# Altium PCB sEMG_sensor_V1.PcbDoc
Units mil, origin at the board's own origin, x right, y up, seen from the top; angles counter-clockwise.
Board outline 6000 x 4000 mil, 2 copper layers (Top Layer, Bottom Layer); 29 components, 27 nets, 82 pads, 0 vias.
Unrouted connection lines stored in the file: 55.
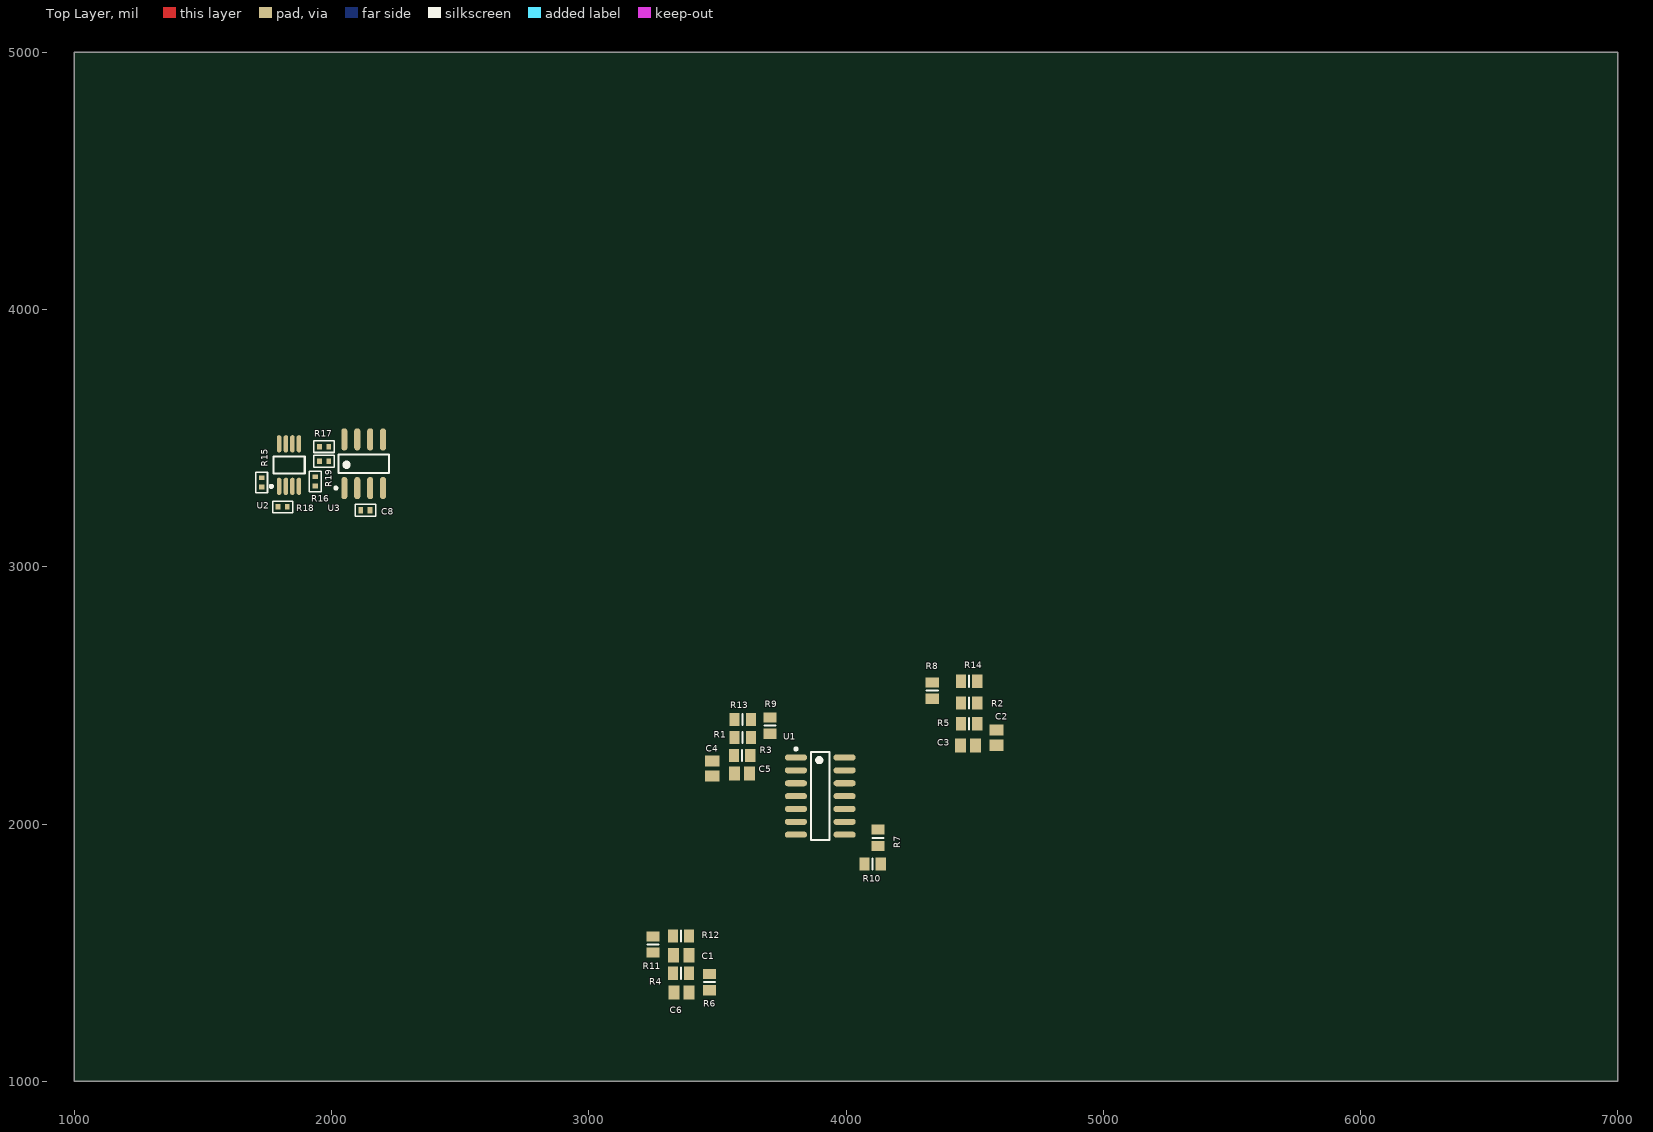
[diagram p0: Top Layer view]
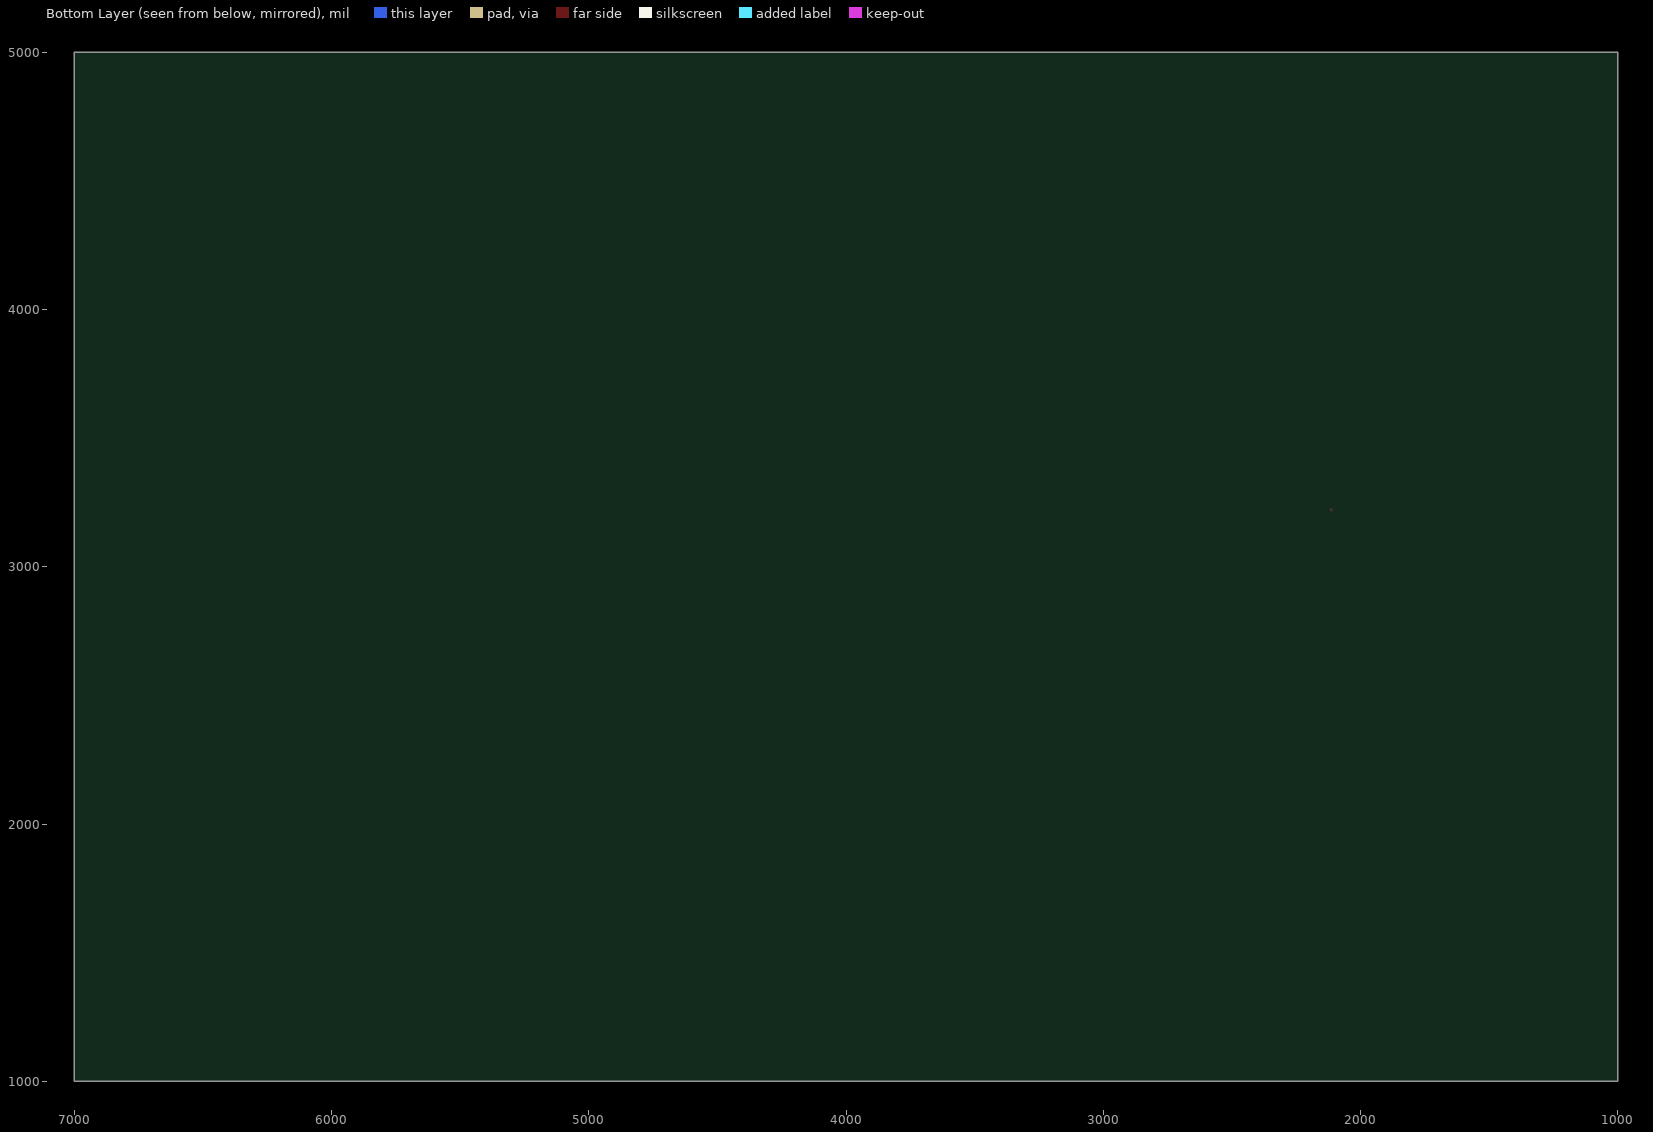
[diagram p1: Bottom Layer view, seen from below]

## Layer stack, top to bottom
Top Solder: solder mask 0.4, Solder Resist, Dk 3.5
Top Layer: signal copper 1.4
Dielectric 1: dielectric 12.6, FR-4, Dk 4.8
Bottom Layer: signal copper 1.4
Bottom Solder: solder mask 0.4, Solder Resist, Dk 3.5

## Board outline
1000,1000 7000,1000 7000,5000 1000,5000

## Design rules (kind name [scope] priority, off if disabled: settings)
Clearance [All] p1: gap=10 ignorepadtopadclearanceinfootprint=FALSE except(0: Arc-Hole Track-Hole SMDPad-Hole THPad-Hole Via-Hole Fill-Hole Poly-Hole Region-Hole Text-Hole; 1: SMDPad-SMDPad)
PolygonConnect [All] p1: connectstyle=Relief reliefconductorwidth=10 reliefentries=4 polygonreliefangle="90 Angle" airgapwidth=10
RoomDefinition BandPassFilter [InComponentClass('BandPassFilter')] p1: confinementstyle=ConfineIn formatcopy=TRUE lockcomponents=FALSE outline 2825,478.5 6980,478.5 6980,1048.5 2825,1048.5
RoutingVias [All] p1: holewidth=28 width=50 viastyle="Through Hole" minholewidth=28 minwidth=50 maxholewidth=28 maxwidth=50
SolderMaskExpansion [All] p1: expansion=4 istentingtop=FALSE
Width [All] p1: maxlimit=10 minlimit=10 preferedwidth=10
30 further rules are at their usual default settings.

## Classes and differential pairs
component class PreAmplifier: C8 R15 R16 R17 R18 R19 U2 U3
component class BandPassFilter: C1 C2 C3 C4 C5 C6 R1 R2 R3 R4 R5 R6 R7 R8 R9 R10 R11 R12 R13 R14 U1

## Components (designator, comment, footprint, x,y, rotation, side; value= is the part's Value field where it differs from the comment)
C1 "Cap" C0805 3359.53,1490 r0 top value=3.3nF
C2 "Cap" C0805 4585,2335.47 r270 top value=22nF
C3 "Cap" C0805 4474.53,2305 r180 top value=22nF
C4 "Cap" C0805 3480,2215.47 r90 top value=22nF
C5 "Cap" C0805 3595.47,2195.95 r180 top value=22nF
C6 "Cap" C0805 3360.47,1345 r180 top value=3.3nF
C8 "C0402" 0402cap 2131.95,3220 r180 top value=10pF
R1 "Res1" 6-0805_L 3598.5,2335.94 r180 top value=51K
R2 "Res1" 6-0805_L 4478.5,2470 r0 top value=51K
R3 "Res1" 6-0805_L 3596.5,2265.94 r180 top value=390K
R4 "Res1" 6-0805_L 3358.5,1420 r0 top value=51K
R5 "Res1" 6-0805_L 4478.5,2390 r0 top value=390K
R6 "Res1" 6-0805_L 3470,1385 r270 top value=24K
R7 "Res1" 6-0805_L 4125,1946.5 r270 top value=240K
R8 "Res1" 6-0805_L 4335,2518.5 r270 top value=1K
R9 "Res1" 6-0805_L 3705,2382.44 r90 top value=16K
R10 "Res1" 6-0805_L 4103.5,1845 r0 top value=2K
R11 "Res1" 6-0805_L 3250,1531.5 r270 top value=68K
R12 "Res1" 6-0805_L 3358.5,1565 r180 top value=68K
R13 "Res1" 6-0805_L 3598.5,2405.94 r0 top value=390K
R14 "Res1" 6-0805_L 4478.5,2555 r180 top value=390K
R15 "R0402" 0402RES 1728.29,3327.68 r270 top value=1.0k
R16 "R0402" 0402RES 1937.03,3331.56 r90 top value=10k
R17 "R0402" 0402RES 1971.1,3467.07 r0 top value=2.0k
R18 "R0402" 0402RES 1810.24,3232.68 r0 top value=390k
R19 "R0402" 0402RES 1971.01,3410 r0 top value=2.0k
U1 "LMP8674MA/NOPB" M14A_N 3900,2108.5 r0 top
U2 "SM73307MMX/NOPB" MUA08A_N 1834.91,3395.35 r90 top
U3 "INA128U" TI-D8_N 2125,3400.51 r90 top

## Footprints (in the part's own frame and the unit in brackets; to place one, negate y for a bottom-side part, rotate by r counter-clockwise, add the part's x,y. Pads: shape width x height; smd on the part's side, far side on the other; paste and mask are expansions set on the pad)
6-0805_L [mm] "Chip Resistor, Body 2.0x1.2mm, IPC High Density"
  rect 1x1.3 smd: 1(-0.8,0) 2(0.8,0)
  silkscreen extent 0,-0.55 0,0.55, body extent -1.07,-0.7 1.07,0.7, height 0.7
0402cap [mm] "Chip Capacitor; Body 1.0 x 0.5 mm (LxW typ)"
  rect 0.47x0.64 smd: 1(-0.458,0) 2(0.458,0)
  silkscreen extent -1,-0.58 1,0.58, body extent -1,-0.58 1,0.58, height 0.2
0402RES [mm] "Chip Resistor; Body 1.0 x 0.5 mm (LxW typ)"
  rect 0.47x0.549 smd: 1(-0.458,0) 2(0.458,0)
  silkscreen extent -1,-0.58 1,0.58, body extent -1,-0.58 1,0.58, height 0.27
C0805 [mm] "Chip Capacitor, Body 2.0x1.3mm, IPC High Density"
  rect 1.1x1.4 smd: 1(-0.75,0) 2(0.75,0)
  body extent -1.1,-0.72 1.1,0.72, height 1.4
M14A_N [mm] "SOIC, 14-Leads, Body 8.6x3.9mm, Pitch 1.27mm, IPC Medium Density"
  oval 2.2x0.6 smd: 1(-2.4,3.81) 2(-2.4,2.54) 3(-2.4,1.27) 4(-2.4,0) 5(-2.4,-1.27) 6(-2.4,-2.54) 7(-2.4,-3.81) 8(2.4,-3.81) 9(2.4,-2.54) 10(2.4,-1.27) 11(2.4,0) 12(2.4,1.27) 13(2.4,2.54) 14(2.4,3.81)
  silkscreen extent -2.52,-4.35 0.9,4.78, body extent -2,-4.37 2,4.37, height 1.75
MUA08A_N [mm] "TSOP, 8-Leads, Body 3x3mm, Pitch 0.65mm, IPC Medium Density"
  oval 1.7x0.45 smd: 1(-2.1,0.975) 2(-2.1,0.325) 3(-2.1,-0.325) 4(-2.1,-0.975) 5(2.1,-0.975) 6(2.1,-0.325) 7(2.1,0.325) 8(2.1,0.975)
  silkscreen extent -2.22,-1.55 0.85,1.87, body extent -1.55,-1.55 1.55,1.55, height 1.09
TI-D8_N [mm] "SOIC, 8-Leads, Body 5x4mm, Pitch 1.27mm, IPC Medium Density"
  oval 2.2x0.6 smd: 1(-2.4,1.905) 2(-2.4,0.635) 3(-2.4,-0.635) 4(-2.4,-1.905) 5(2.4,-1.905) 6(2.4,-0.635) 7(2.4,0.635) 8(2.4,1.905)
  silkscreen extent -2.52,-2.5 0.9,2.88, body extent -2,-2.5 2,2.5, height 1.75

## Part data
C1 C2 C3 C4 C5 C6: "Capacitor", LatestRevisionDate=17-Jul-2002, LatestRevisionNote="Re-released for DXP Platform.", PackageDescription="Radial Cap, Thru-Hole; 2 Leads; 0.3 in Pin Spacing", PackageReference=RAD-0.3, Published=8-Jun-2000, Publisher="Altium Limited"
C8: "0402 Ceramic Chip Capacitor - Standard"
R1 R2 R3 R4 R5 R6 R7 R8 R9 R10 R11 R12 R13 R14: "Resistor", LatestRevisionDate=17-Jul-2002, LatestRevisionNote="Re-released for DXP Platform.", PackageDescription="Axial Device, Thru-Hole; 2 Leads; 0.3 in Pin Spacing", PackageReference=AXIAL-0.3, Published=8-Jun-2000, Publisher="Altium Limited"
R15 R16 R17 R18 R19: "0402 Chip Resistor - Standard"
U1: "Quad 40V Low Noise Precision Amplifier, 14-pin Narrow SOIC, 55 Rail", Manufacturer="National Semiconductor", PackageTopMarking=NSUZXYTTE#*LMP8674*MA, PowerWise=N, Code_IPC=SOIC127P600-14, Code_JEDEC=MS-012AB, ComponentLink1Description="Manufacturer URL", ComponentLink1URL=http://www.national.com/, ComponentLink2Description="LMP8674 Datasheet", ComponentLink2URL=http://www.national.com/ds/LM/LMP8674.pdf, ComponentLink3Description="LMP8674 Web Page", ComponentLink3URL=http://www.national.com/pf/LM/LMP8674.html, ComponentLink4Description="M14A Package Page", ComponentLink4URL=http://www.national.com/packaging/folders/m14a.html, CompType=Amplifiers, DatasheetVersion=Jul-2011, High-Reliability=Y, PackageDescription="Molded Package S.O., .150in Wide, 14 Lead", PackageReference=M14A, PackageVersion="revJ, Jan-1996", PartNumber=LMP8674MA/NOPB, PinCount=14, RoHS=Y
U2: "Dual Precision, 17 MHz, Low Noise, CMOS Input Amplifier, 8-pin Mini SOIC, 3500 Reel", Manufacturer="National Semiconductor", PackageTopMarking=ZXTT*S307, PowerWise=N, Code_JEDEC=MO-187-AA, ComponentLink1Description="Manufacturer URL", ComponentLink1URL=http://www.national.com/, ComponentLink2Description="SM73307 Datasheet", ComponentLink2URL=http://www.national.com/ds/SM/SM73307.pdf, ComponentLink3Description="SM73307 Web Page", ComponentLink3URL=http://www.national.com/pf/SM/SM73307.html, ComponentLink4Description="MUA08A Package Page", ComponentLink4URL=http://www.national.com/packaging/folders/mua08a.html, CompType=Amplifiers, DatasheetVersion=Jun-2011, High-Reliability=Y, PackageDescription="MINI SOIC, .118 x .118 x .034in, 8 Lead, .0256in Pitch", PackageReference=MUA08A, PackageVersion="revF, Apr-2008", PartNumber=SM73307MMX/NOPB, PinCount=8, RoHS=Y
U3: "Precision, Low Power Instrumentation Amplifier, -40 to 85 degC, 8-pin SOIC (D8), Green (RoHS & no Sb/Br)", Input Bias Current (+/-)(Max)(nA)=5, Manufacturer="Texas Instruments", Quiescent Current (+/-)(Typ)(mA)=0.7, Supplier Part Number 1=INA128U-ND, CMRR(Min)(dB)=120, Code_JEDEC=MS-012, ComponentLink1Description="Manufacturer URL", ComponentLink1URL=http://www.ti.com/, ComponentLink2Description=Datasheet, ComponentLink2URL=http://www.ti.com/general/docs/lit/getliterature.tsp?genericPartNumber=INA128&fileType=pdf, ComponentLink3Description="Package Specification", ComponentLink3URL=http://www.ti.com/litv/pdf/msoi002j, DatasheetVersion=SBOS051B, Eco-Plan="Green (RoHS & no Sb/Br)", Gain(V/V)="1 to 10000", Input Offset (+/-)(Max)(uV)=50, Input Offset Drift (+/-)(Max)(uV/Degrees Celsius)=0.5, Mounting Technology="Surface Mount", Noise at 1kHz(Typ)(nV/rt(Hz))=8, Non-Linearity (+/-)(Max)(%)=0.002, Number of Channels=1, PackageDescription="8-Pin Plastic Small Outline, Body 4.9 x 3.9 mm, Pitch 1.27 mm", PackageReference=D8, PackageVersion="4040047-3/M, 06/2011", PartNumber=INA128U, SubFamily="Dual Supply", Supplier 1=Digi-Key, Supplier 2=Farnell, Supplier 3=Newark, Supplier 4=Mouser, Supplier Part Number 2=1212413, Supplier Part Number 3=35C1729, Supplier Part Number 4=595-INA128U, Vs(Max)(V)=36, Vs(Min)(V)=4.5

## Nets (pads, with @x,y where several pads share a name; then routed paths per layer and width w, separated by ;. In a path a pad name is that pad's centre, name@x,y a point inside that pad or via, vN(x,y) a via of type N, cw(c..) or ccw(c..) an arc to the next point about the centre after c; other vN are vias at no path point)
+9: U1.4 U2.8 U3.7
-9: U1.11 U2.4 U3.4
GND: C1.1 R1.2 R2.2 R3.2 R4.1 R5.2 U1.10 U2.3 U3.5
NetC1_2: C1.2 R12.1 U1.5
NetC2_1: C2.1 R7.2 U1.8
NetC2_2: C2.2 C3.1 R14.2
NetC3_2: C3.2 R5.1 U1.12
NetC4_1: C4.1 C5.2 R13.1
NetC4_2: C4.2 U3.6
NetC5_1: C5.1 R3.1 U1.3
NetC6_1: C6.1 R6.2 R10.1 U1.7
NetC6_2: C6.2 R11.1 R12.2
NetC8_1: C8.1 U3.3
NetC8_2: C8.2 U3.2 | length 3.3
  Top Layer w10: C8.2 C8.2@2113.9,3223.35
NetR1_1: R1.1 R9.1 U1.2
NetR2_1: R2.1 R8.2 U1.13
NetR4_2: R4.2 R6.1 U1.6
NetR7_1: R7.1 R10.2 U1.9
NetR8_1: R8.1 R14.1 U1.14
NetR9_2: R9.2 R11.2 R13.2 U1.1
NetR15_1: R15.1
NetR15_2: R15.2 R18.1 U2.1
NetR16_1: R16.1 R18.2 U2.2
NetR16_2: R16.2 U2.5 U2.7
NetR17_1: R17.1 R19.1 U2.6
NetR17_2: R17.2 U3.1
NetR19_2: R19.2 U3.8